# Altium PCB Vertical.PcbDoc
Units mm, origin at the board's own origin, x right, y up, seen from the top; angles counter-clockwise.
Board outline 53.95 x 47.07 mm, 2 copper layers (Top Layer, Bottom Layer), stack 1.58 mm thick; 38 components, 9 nets, 75 pads, 43 vias.
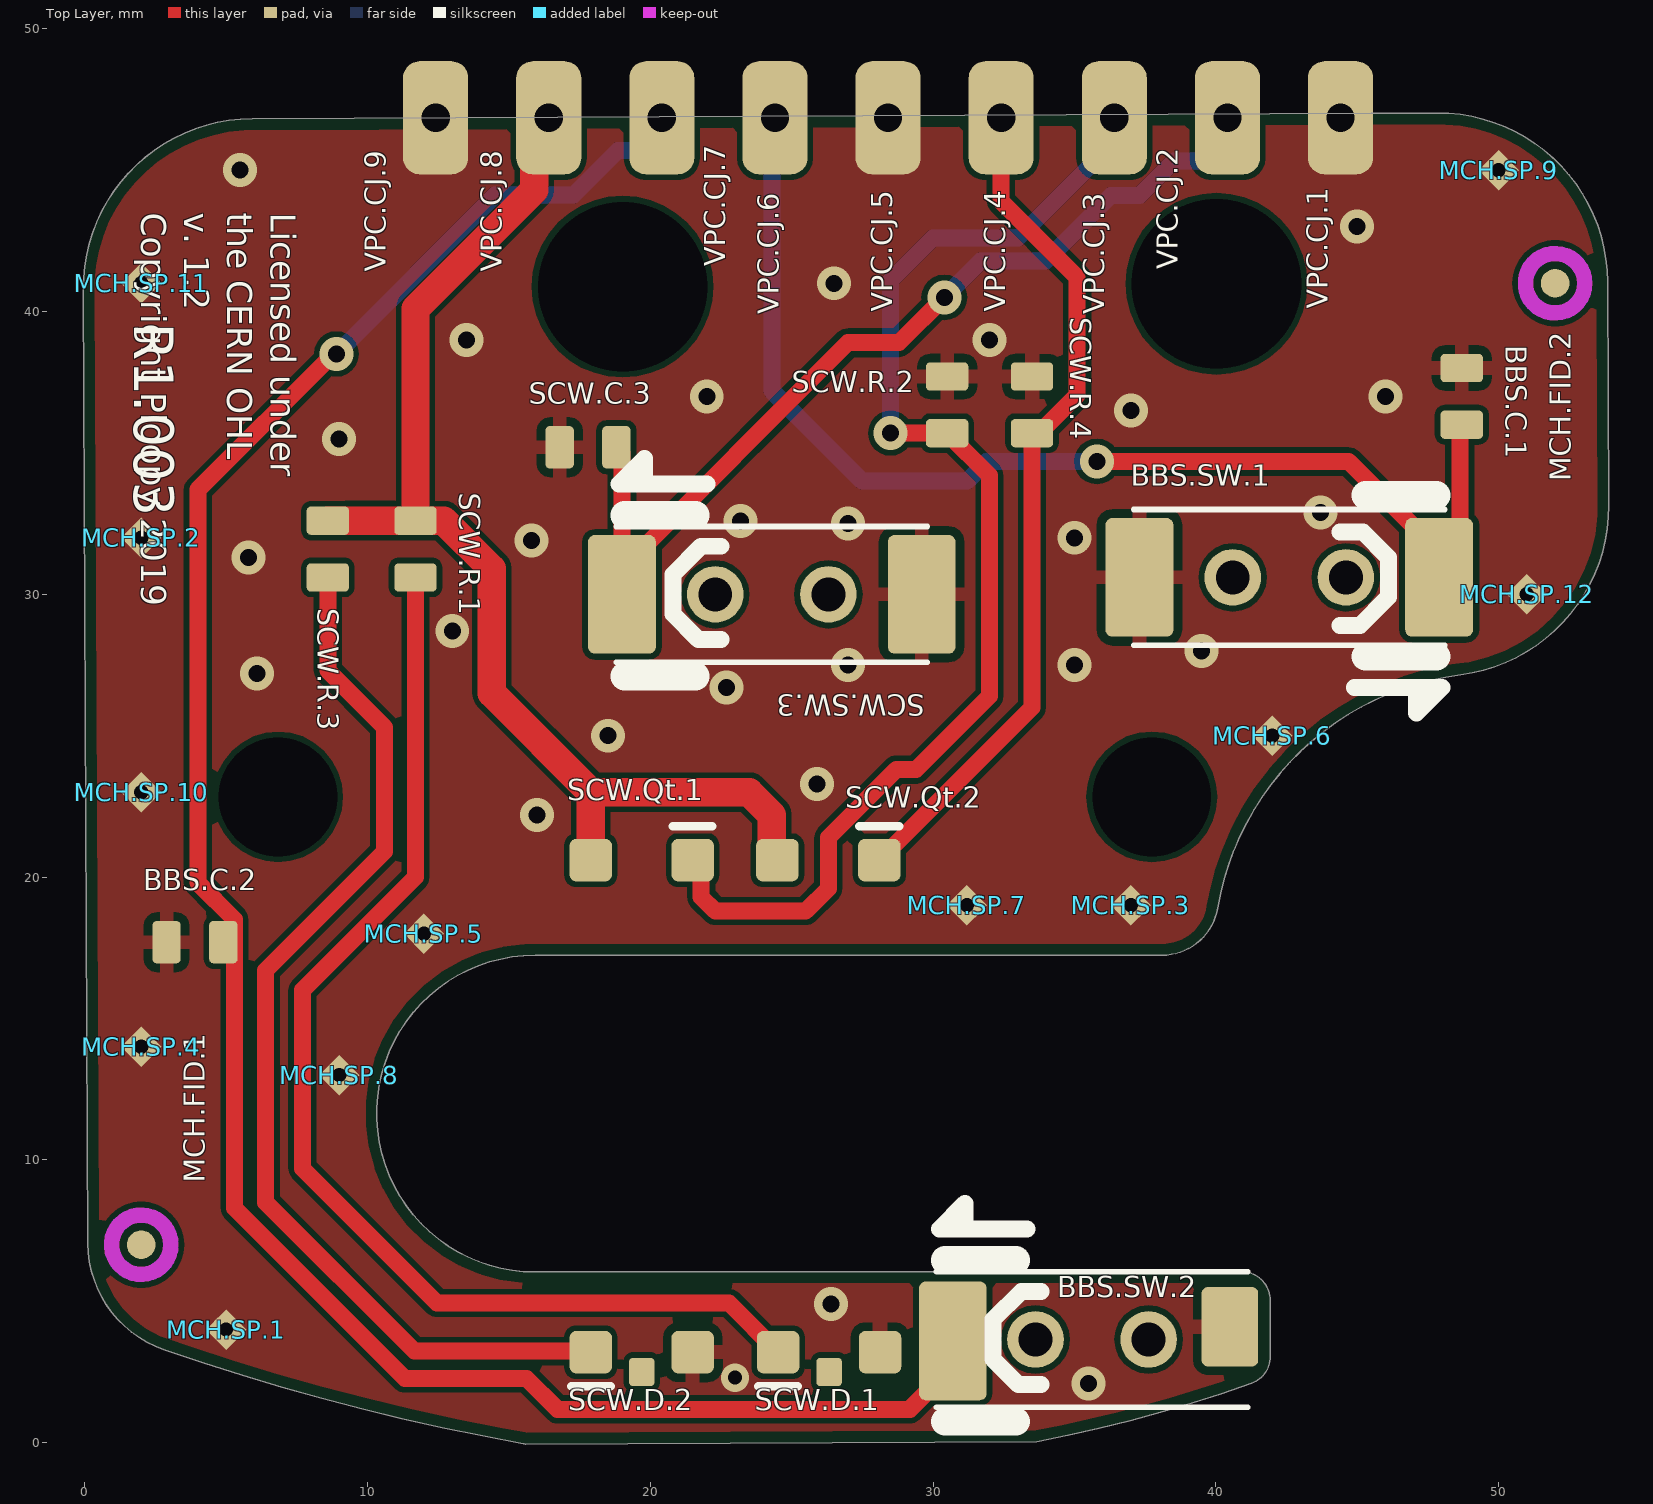
[diagram p0: Top Layer view]
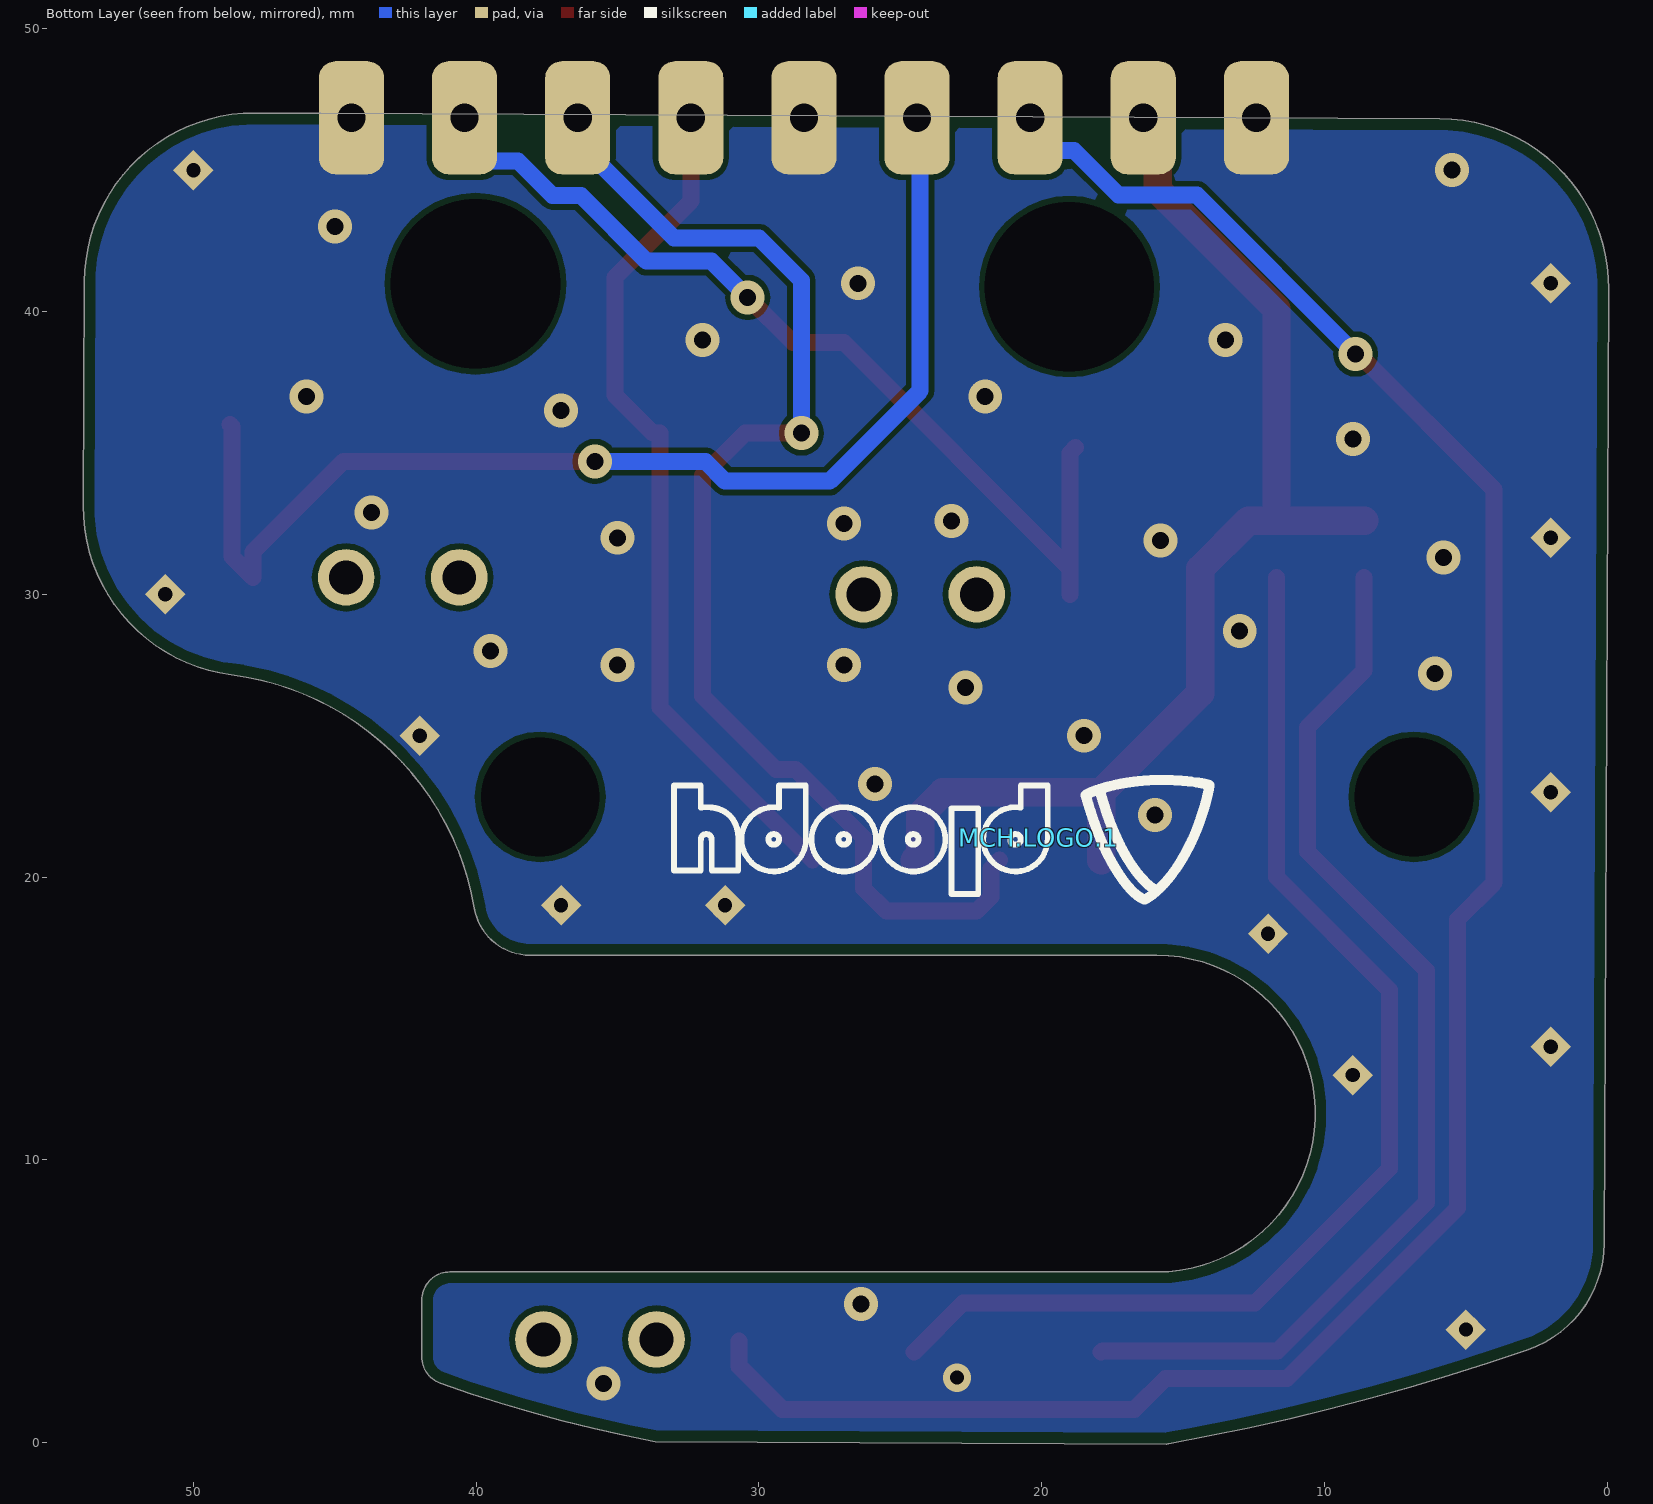
[diagram p1: Bottom Layer view, seen from below]

## Layer stack, top to bottom
Top Mask: solder mask 0.01, Solder Resist, Dk 3.5
Top Layer: signal copper 0.0356
Dielectric 4: core 1.509, Dk 4.2
Bottom Layer: signal copper 0.0356
Bottom Solder: solder mask 0.01, Solder Resist, Dk 3.5

## Board outline
2.805,3.289 ccw(c30.608,83.613) 15.509,-0.035 ccw(c24.39,49.169) 15.591,-0.05 33.666,0.037 ccw(c24.391,49.17) 41.267,2.104 ccw(c40.929,3.045) 41.929,3.045 41.929,5.037 ccw(c40.929,5.037) 40.929,6.037 15.929,6.037 cw(c15.929,11.637) 15.929,17.237 38.097,17.237 ccw(c38.097,19.237) 40.069,18.904 cw(c49.929,17.237) 48.659,27.156 ccw(c47.897,33.108) 53.897,33.137 53.858,41.05 ccw(c47.858,41.021) 47.829,47.021 45.521,47.009 5.921,46.818 ccw(c5.95,40.818) -0.05,40.789 0.113,7.049 ccw(c4.113,7.069)

## Design rules (kind name [scope] priority, off if disabled: settings)
BoardOutlineClearance [(Not HasFootprint('SPARKGAP'))] p1: gap=0.4 ignorepadtopadclearanceinfootprint=FALSE
Clearance "HighV Pads" [(InNetClass('HighV') AND (IsPad OR IsVia)) vs IsPad OR IsVia] p1: gap=0.4 ignorepadtopadclearanceinfootprint=FALSE except(0: Arc-Hole Track-Hole SMDPad-Hole THPad-Hole Via-Hole Fill-Hole Poly-Hole Region-Hole Text-Hole) // Establishes minimum clearance between bare pads that are high voltage, per IPC2221A Table 6-1, 51-100V, condition A6
Clearance Inter-Pad [IsPad vs IsPad] p2: gap=0.2 ignorepadtopadclearanceinfootprint=FALSE except(0: Arc-Hole Track-Hole SMDPad-Hole THPad-Hole Via-Hole Fill-Hole Poly-Hole Region-Hole Text-Hole)
Clearance "Spark Gaps" [InNetClass('Spark Gap') vs InNet('GND') And InPoly] p3: gap=0.635 ignorepadtopadclearanceinfootprint=FALSE except(0: Arc-Hole Track-Hole SMDPad-Hole THPad-Hole Via-Hole Fill-Hole Poly-Hole Region-Hole Text-Hole)
Clearance FIDs [Name like 'FID*'] p4: gap=1.016 ignorepadtopadclearanceinfootprint=FALSE except(0: Arc-Hole Track-Hole SMDPad-Hole THPad-Hole Via-Hole Fill-Hole Poly-Hole Region-Hole Text-Hole)
Clearance "Inner Planes" [InPoly AND OnMid] p5: gap=0.3 ignorepadtopadclearanceinfootprint=FALSE except(0: Arc-Hole Track-Hole SMDPad-Hole THPad-Hole Via-Hole Fill-Hole Poly-Hole Region-Hole Text-Hole) // Defines a larger clearance for planes on inner layers.
Clearance "All Planes" [InPoly] p6: gap=0.2 ignorepadtopadclearanceinfootprint=FALSE except(0: Arc-Hole Track-Hole SMDPad-Hole THPad-Hole Via-Hole Fill-Hole Poly-Hole Region-Hole Text-Hole) // Defines minimum clearance between planes on the same layer.
Clearance "Inner Layer Clearance" [OnMid vs OnMid] p7: gap=0.3 ignorepadtopadclearanceinfootprint=FALSE except(0: Arc-Hole Track-Hole SMDPad-Hole THPad-Hole Via-Hole Fill-Hole Poly-Hole Region-Hole Text-Hole) // We will give inner layers more spacing because they tend to be subject to stricter process limits.
Clearance [All] p8: gap=0.22 ignorepadtopadclearanceinfootprint=FALSE except(0: Arc-Hole Track-Hole SMDPad-Hole THPad-Hole Via-Hole Fill-Hole Poly-Hole Region-Hole Text-Hole) // 2 oz (70um) boards require at least 10mil spacing. We give a bit more to make sure things work well.
ComponentClearance "Terminal Block" [(HasFootprint('Phoenix 1933189 - Header')) vs (HasFootprint('Phoenix 1933189 - Header'))] p1: gap=-2.286 collisioncheckmode=3 verticalgap=0.254 showdistances=FALSE
ComponentClearance "FET/TP self Clearance" [(Name like 'Q*') Or (Name like 'TP*') vs (Name like 'Q*') Or (Name like 'TP*')] p2: gap=0.254 collisioncheckmode=3 verticalgap=0.254 showdistances=FALSE
ComponentClearance [Not ((Name like 'H*') Or (Name like 'FID*') Or (Name like 'SP*')) vs Not ((Name like 'H*') Or (Name like 'FID*') Or (Name like 'SP*'))] p3: gap=0.5 collisioncheckmode=3 verticalgap=0.5 showdistances=FALSE
DiffPairsRouting [All] p1: maxlimit=0.508 minlimit=0.279 mostfreqgap=0.279 toplayer_minwidth=0.279 toplayer_maxwidth=0.508 toplayer_prefwidth=0.381 bottomlayer_minwidth=0.279 bottomlayer_maxwidth=0.508 bottomlayer_prefwidth=0.381 maxuncoupledlength=12.7
Height [All] p1: minheight=0 maxheight=41 prefheight=12.7
HoleSize [All] p1: absolutevalues=TRUE maxlimit=100 minlimit=0.3 maxpercent=80.000 minpercent=20.000
HoleToHoleClearance [All] p1: gap=1.016 allowstackedmicrovias=TRUE
LayerPairs [All] p1: enforce=FALSE
MinimumSolderMaskSliver [All] p1: minsoldermaskwidth=0.09
NetAntennae [Not (HasFootprint('BALANCE_RESISTOR'))] p1: netantennaetolerance=0
PasteMaskExpansion [All] p1: expansion=-0.025
PlaneClearance [All] p1: clearance=0.4
PlaneConnect [All] p1: pad.planeconnectstyle=Relief pad.reliefexpansion=0.5 pad.reliefentries=4 pad.reliefconductorwidth=0.5 pad.reliefairgap=0.3 via.planeconnectstyle=Direct via.reliefexpansion=0.8 via.reliefentries=4 via.reliefconductorwidth=0.8 via.reliefairgap=0.3
PolygonConnect "PolygonConnect SparkGap" [HasFootprint('SparkGap')] p1: connectstyle=Direct reliefconductorwidth=0.254 reliefentries=4 polygonreliefangle="90 Angle" airgapwidth=0.254 // Ensures spark gaps get a direct connection to plane.
PolygonConnect PolygonConnect_GND [All vs InNet('GND')] p2: thpad.connectstyle=Relief thpad.reliefconductorwidth=0.5 thpad.reliefentries=4 thpad.polygonreliefangle="90 Angle" thpad.airgapwidth=0.3 smdpad.connectstyle=Relief smdpad.reliefconductorwidth=0.5 smdpad.reliefentries=4 smdpad.polygonreliefangle="90 Angle" smdpad.airgapwidth=0.3 via.connectstyle=Direct via.reliefconductorwidth=0.8 via.reliefentries=4 via.polygonreliefangle="90 Angle" via.airgapwidth=0.3 // This rule specifies all vias and holes connected to a GND plane have direct connections.
PolygonConnect [All] p3: thpad.connectstyle=Relief thpad.reliefconductorwidth=0.5 thpad.reliefentries=4 thpad.polygonreliefangle="90 Angle" thpad.airgapwidth=0.25 smdpad.connectstyle=Relief smdpad.reliefconductorwidth=0.5 smdpad.reliefentries=4 smdpad.polygonreliefangle="90 Angle" smdpad.airgapwidth=0.25 via.connectstyle=Direct via.reliefconductorwidth=0.508 via.reliefentries=4 via.polygonreliefangle="90 Angle" via.airgapwidth=0.254
RoutingVias [All] p1: holewidth=0.5 width=1 viastyle="Through Hole" minholewidth=0.2 minwidth=0.5 maxholewidth=5.08 maxwidth=6.35
ShortCircuit [Not (InPadClass('TraceResistorPads')) vs Not (InPadClass('TraceResistorPads'))] p1: allowed=FALSE
SilkToBoardRegionClearance [All] p1 off:
SilkToSilkClearance [All] p1 off: silktosilkclearance=0.254
SilkToSolderMaskClearance SilkscreenOverComponentPads [IsPad] p1: minsilkscreentomaskgap=0.102 clearancetoexposedcopper=FALSE
SolderMaskExpansion [All] p1: expansion=0.076
Width [All] p1: maxlimit=50.8 minlimit=0.26 preferedwidth=0.4 minimp=50.000000 maximp=50.000000 favimp=50.000000
15 further rules are at their usual default settings.

## Classes and differential pairs
component class VPC: VPC.CJ.1 VPC.CJ.2 VPC.CJ.3 VPC.CJ.4 VPC.CJ.5 VPC.CJ.6 VPC.CJ.7 VPC.CJ.8 VPC.CJ.9
component class SCW: SCW.C.3 SCW.D.1 SCW.D.2 SCW.Qt.1 SCW.Qt.2 SCW.R.1 SCW.R.2 SCW.R.3 SCW.R.4 SCW.SW.3
component class BBS: BBS.C.1 BBS.C.2 BBS.SW.1 BBS.SW.2
component class MCH: MCH.FID.1 MCH.FID.2 MCH.LOGO.1 MCH.SP.1 MCH.SP.2 MCH.SP.3 MCH.SP.4 MCH.SP.5 MCH.SP.6 MCH.SP.7 MCH.SP.8 MCH.SP.9 MCH.SP.10 MCH.SP.11 MCH.SP.12

## Components (designator, comment, footprint, x,y, rotation, side; value= is the part's Value field where it differs from the comment)
BBS.C.1 "0805" 0805 48.7,37 r0 top value="0.01uF 100V" (schematic designator C1)
BBS.C.2 "0805" 0805 3.9,17.7 r90 top value="0.01uF 100V" (schematic designator C2)
BBS.SW.1 "D2LS-21" D2LS-21#1 42.6,30.6 r180 top (schematic designator SW1)
BBS.SW.2 "D2LS-21" D2LS-21#2 35.625,3.65 r0 top (schematic designator SW2)
MCH.FID.1 "IPC-7351 Fiducial 1mm" FIDUCIAL_1.5 2,7 r90 top (schematic designator FID1)
MCH.FID.2 "IPC-7351 Fiducial 1mm" FIDUCIAL_1.5 52,41 r90 top (schematic designator FID2)
MCH.LOGO.1 "Ploopy logo, silkscreen" PloopyLogo 20.1,21.4 r0 bottom (schematic designator LOGO1)
MCH.SP.1 "Spark Gap" SparkGap 5,4 r90 top (schematic designator SP1)
MCH.SP.2 "Spark Gap" SparkGap 2,32 r90 top (schematic designator SP2)
MCH.SP.3 "Spark Gap" SparkGap 37,19 r90 top (schematic designator SP3)
MCH.SP.4 "Spark Gap" SparkGap 2,14 r90 top (schematic designator SP4)
MCH.SP.5 "Spark Gap" SparkGap 12,18 r90 top (schematic designator SP5)
MCH.SP.6 "Spark Gap" SparkGap 42,25 r90 top (schematic designator SP6)
MCH.SP.7 "Spark Gap" SparkGap 31.2,19 r90 top (schematic designator SP7)
MCH.SP.8 "Spark Gap" SparkGap 9,13 r90 top (schematic designator SP8)
MCH.SP.9 "Spark Gap" SparkGap 50,45 r90 top (schematic designator SP9)
MCH.SP.10 "Spark Gap" SparkGap 2,23 r90 top (schematic designator SP10)
MCH.SP.11 "Spark Gap" SparkGap 2,41 r90 top (schematic designator SP11)
MCH.SP.12 "Spark Gap" SparkGap 51,30 r90 top (schematic designator SP12)
SCW.C.3 "0805" 0805 17.8,35.2 r90 top value="0.01uF 100V" (schematic designator C3)
SCW.D.1 "XZTHI56W-1" XZTHI56W-1 26.325,3.2 r270 top (schematic designator D1)
SCW.D.2 "XZTHI56W-1" XZTHI56W-1 19.7,3.2 r270 top (schematic designator D2)
SCW.Qt.1 "PT26-51B/TR8" PT26-51B/TR8 19.7,20.6 r90 top (schematic designator Qt1)
SCW.Qt.2 "PT26-51B/TR8" PT26-51B/TR8 26.3,20.6 r90 top (schematic designator Qt2)
SCW.R.1 "0805" 0805 11.7,31.6 r180 top value="100R 1%" (schematic designator R1)
SCW.R.2 "0805" 0805 30.5,36.7 r0 top value="1k 1%" (schematic designator R2)
SCW.R.3 "0805" 0805 8.6,31.6 r180 top value="100R 1%" (schematic designator R3)
SCW.R.4 "0805" 0805 33.5,36.7 r0 top value="1k 1%" (schematic designator R4)
SCW.SW.3 "D2LS-21" D2LS-21#1 24.3,30 r0 top (schematic designator SW3)
VPC.CJ.1 "PCBJointCastellationJoint" PCBJoint 44.411,46.851 r0 top (schematic designator CJ1)
VPC.CJ.2 "PCBJointCastellationJoint" PCBJoint 40.411,46.851 r0 top (schematic designator CJ2)
VPC.CJ.3 "PCBJointCastellationJoint" PCBJoint 36.411,46.851 r0 top (schematic designator CJ3)
VPC.CJ.4 "PCBJointCastellationJoint" PCBJoint 32.411,46.851 r0 top (schematic designator CJ4)
VPC.CJ.5 "PCBJointCastellationJoint" PCBJoint 28.411,46.851 r0 top (schematic designator CJ5)
VPC.CJ.6 "PCBJointCastellationJoint" PCBJoint 24.411,46.851 r0 top (schematic designator CJ6)
VPC.CJ.7 "PCBJointCastellationJoint" PCBJoint 20.411,46.851 r0 top (schematic designator CJ7)
VPC.CJ.8 "PCBJointCastellationJoint" PCBJoint 16.411,46.851 r0 top (schematic designator CJ8)
VPC.CJ.9 "PCBJointCastellationJoint" PCBJoint 12.411,46.851 r0 top (schematic designator CJ9)

## Footprints (in the part's own frame and the unit in brackets; to place one, negate y for a bottom-side part, rotate by r counter-clockwise, add the part's x,y. Pads: shape width x height; smd on the part's side, far side on the other; paste and mask are expansions set on the pad)
0805 [mm] "Chip Capacitor, 2-Leads, Body 2.0x1.3mm, IPC Medium Density"
  rrect30% 1.5x1 smd paste-2.515: 1(0,1.002) 2(0,-1.002)
  body extent -0.72,-1.1 0.72,1.1, height 0.8
D2LS-21#1 [mm]
  rrect20% 2.4x4.2 smd paste-0.03: A(-5.3,0) B(5.3,0)
  round 2 hole 1.2: ""(-2,0) ""(2,0)
  silkscreen extent -5.5,-2.9 5.5,4.8, body extent -5.6,-2.4 5.6,2.4, height 3.19
D2LS-21#2 [mm]
  rrect20% 2.4x4.2 smd paste-0.03: A(-4.925,-0.05)
  rrect20% 2x2.8 smd paste-0.03: B(4.875,0.45)
  round 2 hole 1.2: ""(-2,0) ""(2,0)
  silkscreen extent -5.5,-2.9 5.5,4.8, body extent -5.6,-2.4 5.6,2.4, height 3.19
FIDUCIAL_1.5 [mil]
  round 40 smd paste-60 mask+30: 1(0,0)
  Top Layer keep-out circle w21.65: c0,0 r41.34
PCBJoint [mm]
  rrect50% 2.3x4 hole 1 paste-99: 1(0,0)
PloopyLogo [mm]
  silkscreen extent -6.04,-2.03 12.9,2.2
PT26-51B/TR8 [mm]
  rrect30% 1.5x1.5 smd paste-0.06: C(0,1.802) E(0,-1.802)
  silkscreen extent 1.2,-2.5 1.2,-1.1, body extent -2.05,-1.6 0.45,1.6, height 1.6
SparkGap [mil]
  rect 40x40 smd rot 45 paste-99 mask+4: 1(0,0)
  rect 40x40 smd far side rot 45 paste-99 mask+4: 1(0,0)
XZTHI56W-1 [mm]
  rrect30% 1.5x1.5 smd paste-0.06: A(0,-1.802) C(0,1.802)
  rrect30% 1x0.9 smd paste-0.06: ""(0.7,0.002)
  silkscreen extent 1.2,-2.5 1.2,-1.1, body extent -2.29,-1.5 0.2,1.5, height 1

## Part data
BBS.C.1 BBS.C.2 SCW.C.3: library part "Cap 0.01uF 100V", "0805, X5R or better", Supplier Part Number 1=1276-6845-2-ND, PNP-A=0, PNP-da=0, PNP-dx=0, PNP-dy=0, PNP-FeedType=Tape, PNP-Level=1, PNP-Lv=1, PNP-Nzl=2, PNP-PlacePriority=1, PNP-Pt=0, PNP-TapeIndex=1, PNP-TapeWidth=8, PNP-Thk=0.85, PNP-TS=70, PNP-Type=chi, PNP-Voff=0, PNP-W=0, PNP-X=2.00, PNP-Y=1.25, Supplier 1=Digi-Key, Supplier 2=Arrow, Supplier Part Number 2=HFLC7Kmwq4-6R2SVzaQAUvCwxvZH1YjWdj_EBba1ByE
BBS.SW.1 BBS.SW.2 SCW.SW.3: "Compact Surface-mounting Switch for long durability", Supplier Part Number 1=Z4378CT-ND, Supplier 1=Digi-Key, Supplier 2=Mouser, Supplier Part Number 2=653-D2LS-21
MCH.FID.1 MCH.FID.2: library part FIDUCIAL_1.5, PNP-A=1, PNP-da=0, PNP-dx=0, PNP-dy=0, PNP-FeedType=Fiducial, PNP-Level=1, PNP-Lv=1, PNP-Nzl=2, PNP-PlacePriority=0, PNP-Pt=0, PNP-TapeIndex=0, PNP-TapeWidth=0, PNP-Thk=1.02, PNP-TS=70, PNP-Type=MARK1, PNP-Voff=0, PNP-W=0, PNP-X=4, PNP-Y=4
MCH.LOGO.1: library part PloopyLogo, PNP-A=0, PNP-da=0, PNP-dx=0, PNP-dy=0, PNP-FeedType=Tape, PNP-Level=1, PNP-Lv=1, PNP-Nzl=2, PNP-PlacePriority=1, PNP-Pt=0, PNP-TapeIndex=1, PNP-TapeWidth=8, PNP-Thk=1, PNP-TS=70, PNP-Type=CHI, PNP-Voff=0, PNP-W=0, PNP-X=1, PNP-Y=1
MCH.SP.1 MCH.SP.2 MCH.SP.3 MCH.SP.4 MCH.SP.5 MCH.SP.6 MCH.SP.7 MCH.SP.8 MCH.SP.9 MCH.SP.10 MCH.SP.11 MCH.SP.12: "Open square pad for spark gapping", PNP-A=0, PNP-da=0, PNP-dx=0, PNP-dy=0, PNP-FeedType=Tape, PNP-Level=1, PNP-Lv=1, PNP-Nzl=2, PNP-PlacePriority=1, PNP-Pt=0, PNP-TapeIndex=1, PNP-TapeWidth=8, PNP-Thk=1, PNP-TS=70, PNP-Type=CHI, PNP-Voff=0, PNP-W=0, PNP-X=1, PNP-Y=1
SCW.D.1 SCW.D.2: "Infrared (IR) Emitter 880nm 1.3V 50mA 1mW/sr @ 20mA 30° 2-SMD, No Lead", Supplier Part Number 1=1497-1205-1-ND, PNP-A=0, PNP-da=0, PNP-dx=0, PNP-dy=0, PNP-FeedType=Tape, PNP-Level=1, PNP-Lv=26, PNP-Nzl=2, PNP-PlacePriority=1, PNP-Pt=0, PNP-TapeIndex=1, PNP-TapeWidth=8, PNP-Thk=0.9, PNP-TS=70, PNP-Type=CAP, PNP-Voff=0, PNP-W=0, PNP-X=2.00, PNP-Y=1.25, Supplier 1=Digi-Key
SCW.Qt.1 SCW.Qt.2: "Phototransistor 940nm Side View 1206 (3216 Metric)", Supplier Part Number 1=1080-1387-1-ND, PNP-A=0, PNP-da=0, PNP-dx=0, PNP-dy=0, PNP-FeedType=Tape, PNP-Level=1, PNP-Lv=26, PNP-Nzl=2, PNP-PlacePriority=1, PNP-Pt=0, PNP-TapeIndex=1, PNP-TapeWidth=8, PNP-Thk=0.9, PNP-TS=70, PNP-Type=CAP, PNP-Voff=0, PNP-W=0, PNP-X=2.00, PNP-Y=1.25, Supplier 1=Digi-Key, Supplier 2=Arrow, Supplier 3=Mouser, Supplier Part Number 2=PT26-51B/TR8, Supplier Part Number 3=638-PT2651BTR8
SCW.R.1 SCW.R.3: library part "Res 100R 1% 0805", "Chip resistor", Supplier Part Number 1=RMCF0805FT100RCT-ND, PNP-A=0, PNP-da=0, PNP-dx=0, PNP-dy=0, PNP-FeedType=Tape, PNP-Level=1, PNP-Lv=1, PNP-Nzl=2, PNP-PlacePriority=1, PNP-Pt=0, PNP-TapeIndex=1, PNP-TapeWidth=8, PNP-Thk=0.55, PNP-TS=70, PNP-Type=chi, PNP-Voff=0, PNP-W=0, PNP-X=2.00, PNP-Y=1.25, Supplier 1=Digi-Key, Supplier 2=Digi-Key, Supplier Part Number 2=RMCF0805FT100RTR-ND
SCW.R.2 SCW.R.4: library part "Res 1k 1% 0805", "Chip resistor, 1/8W 100PPM", Supplier Part Number 1=RMCF0805FT1K00TR-ND, PNP-A=0, PNP-da=0, PNP-dx=0, PNP-dy=0, PNP-FeedType=Tape, PNP-Level=1, PNP-Lv=1, PNP-Nzl=2, PNP-PlacePriority=1, PNP-Pt=0, PNP-TapeIndex=1, PNP-TapeWidth=8, PNP-Thk=0.55, PNP-TS=70, PNP-Type=chi, PNP-Voff=0, PNP-W=0, PNP-X=2.00, PNP-Y=1.25, Supplier 1=Digi-Key
VPC.CJ.1 VPC.CJ.2 VPC.CJ.3 VPC.CJ.4 VPC.CJ.5 VPC.CJ.6 VPC.CJ.7 VPC.CJ.8 VPC.CJ.9: library part PCBJoint, "Pad for soldering a castellated PCB edge. Easy way to join two PCBs together.", PNP-A=0, PNP-da=0, PNP-dx=0, PNP-dy=0, PNP-FeedType=Tape, PNP-Level=1, PNP-Lv=1, PNP-Nzl=2, PNP-PlacePriority=1, PNP-Pt=0, PNP-TapeIndex=1, PNP-TapeWidth=8, PNP-Thk=1, PNP-TS=70, PNP-Type=CHI, PNP-Voff=0, PNP-W=0, PNP-X=1, PNP-Y=1

## Free pads (board coordinates)
  round 0 hole 4.2: ""(6.838,22.837) ""(37.738,22.837)
  round 0 hole 6: ""(19.023,40.881) ""(40.023,40.983)

## Via types
v1: diameter 1.2, hole 0.6, Top Layer to Bottom Layer, 30 vias
v2: diameter 1.016, hole 0.508, Top Layer to Bottom Layer, 12 vias
v3: diameter 1, hole 0.5, Top Layer to Bottom Layer, 1 vias

## Nets (pads, with @x,y where several pads share a name; then routed paths per layer and width w, separated by ;. In a path a pad name is that pad's centre, name@x,y a point inside that pad or via, vN(x,y) a via of type N, cw(c..) or ccw(c..) an arc to the next point about the centre after c; other vN are vias at no path point)
3V3: SCW.Qt.1.C SCW.Qt.2.C SCW.R.1.2 SCW.R.3.2 VPC.CJ.8.1 | length 41.8
  Top Layer w1: SCW.R.3.2 SCW.R.1.2 ; VPC.CJ.8.1@16.411,45.556 16.099,45.556 15.9,45.357 15.9,44.3 11.7,40.1 SCW.R.1.2 ; SCW.Qt.1.C 17.898,23.002 ; SCW.Qt.2.C 24.3,20.798 24.3,22.2 23.498,23.002 17.898,23.002 ; SCW.R.1.2 12.698,32.602 14.4,30.9 14.4,26.5 17.898,23.002
GND: BBS.C.1.1 BBS.C.2.1 BBS.SW.1.B BBS.SW.2.B MCH.SP.1.1 MCH.SP.2.1 MCH.SP.3.1 MCH.SP.4.1 MCH.SP.5.1 MCH.SP.6.1 MCH.SP.7.1 MCH.SP.8.1 MCH.SP.9.1 MCH.SP.10.1 MCH.SP.11.1 MCH.SP.12.1 SCW.C.3.1 SCW.D.1.C SCW.D.2.C SCW.R.2.1 SCW.R.4.1 SCW.SW.3.B VPC.CJ.1.1 VPC.CJ.5.1 VPC.CJ.9.1
  other v1: 35.5,2.1 26.4,4.9 16,22.2 25.9,23.3 18.5,25 22.7,26.7 6.1,27.2 27,27.5 35,27.5 39.5,28 13,28.7 5.8,31.3 15.8,31.9 35,32 27,32.5 23.2,32.6 43.7,32.9 9,35.5 37,36.5 22,37 46,37 13.5,39 32,39 26.5,41 45,43 5.5,45
  other v2: 5,4 9,13 2,14 12,18 31.2,19 37,19 2,23 42,25 51,30 2,32 2,41 50,45
  other v3: 23,2.3
NetBBS.C.1_2: BBS.C.1.2 BBS.SW.1.A VPC.CJ.6.1 | length 41.8
  Top Layer w0.6: v1(35.8,34.7) 44.7,34.7 47.9,31.5 BBS.SW.1.A 48.63,31.33 48.63,35.928 BBS.C.1.2
  Bottom Layer w0.6: VPC.CJ.6.1@24.411,45.794 24.3,45.683 24.3,37.2 27.5,34 31.197,34 31.897,34.7 v1(35.8,34.7)
NetBBS.C.2_2: BBS.C.2.2 BBS.SW.2.A VPC.CJ.7.1 | length 77.2
  Top Layer w0.6: v1(8.9,38.5) 8.8,38.5 4,33.7 4,19.8 5.3,18.5 5.3,8.3 11.327,2.273 15.627,2.273 16.72,1.18 29.18,1.18 30.7,2.7 BBS.SW.2.A
  Bottom Layer w0.6: v1(8.9,38.5) 14.518,44.118 17.282,44.118 18.864,45.7 20.337,45.7 VPC.CJ.7.1@20.411,45.775
NetSCW.C.3_2: SCW.C.3.2 SCW.SW.3.A VPC.CJ.2.1 | length 32.9
  Top Layer w0.6: SCW.C.3.2 19,35.002 SCW.SW.3.A@19,30.9 ; SCW.SW.3.A SCW.SW.3.A@19,30.9 ; v1(30.4,40.5) 28.8,38.9 27,38.9 SCW.SW.3.A@19,30.9
  Bottom Layer w0.6: v1(30.4,40.5) 31.68,41.78 33.98,41.78 36.3,44.1 37.3,44.1 38.521,45.321 39.861,45.321 VPC.CJ.2.1@40.411,45.871
NetSCW.D.1_A: SCW.D.1.A SCW.R.1.1 | length 42.1
  Top Layer w0.6: SCW.R.1.1 11.7,20 7.7,16 7.7,9.7 12.463,4.937 22.785,4.937 SCW.D.1.A
NetSCW.D.2_A: SCW.D.2.A SCW.R.3.1 | length 38.4
  Top Layer w0.6: SCW.R.3.1 8.6,27.3 10.6,25.3 10.6,20.9 6.4,16.7 6.4,8.5 11.662,3.238 17.859,3.238 SCW.D.2.A
NetSCW.Qt.1_E: SCW.Qt.1.E SCW.R.2.2 VPC.CJ.3.1 | length 43.2
  Top Layer w0.6: SCW.Qt.1.E 21.8,20.302 21.8,19.3 22.3,18.8 25.5,18.8 26.3,19.6 26.3,21.4 28.7,23.8 29.4,23.8 32,26.4 32,34.198 SCW.R.2.2 28.602,35.698 28.6,35.7 v1(28.5,35.7)
  Bottom Layer w0.6: v1(28.5,35.7) 28.5,41.1 30,42.6 33.01,42.6 36.262,45.852 VPC.CJ.3.1@36.411,45.852
NetSCW.Qt.2_E: SCW.Qt.2.E SCW.R.4.2 VPC.CJ.4.1 | length 29.4
  Top Layer w0.6: SCW.Qt.2.E 33.5,25.998 SCW.R.4.2 33.75,35.698 35.1,37.048 35.1,41.2 32.4,43.9 32.4,45.821 VPC.CJ.4.1@32.411,45.833
pads on no net: BBS.SW.1. BBS.SW.2. MCH.FID.1.1 MCH.FID.2.1 SCW.D.1. SCW.D.2. SCW.SW.3.

## Polygon pours and split planes (outlines as drawn)
GND on Bottom Layer "Bottom Layer-GND" (solid, pour order 0): -1,-1 55,-1 55,49 -1,49
GND on Top Layer "Top Layer-GND" (solid, pour order 2): -1,-1 55,-1 55,49 -1,49

## Silkscreen, mask and mechanical layers (free items; w line width, h text height)
Top Overlay:
  text "Licensed under  / the CERN OHL  / v. 1.2  / Copyright Ploopy 2019" at 1.7,43.5 h1.52 r270
  text "R1.003" at 1.3,39.6 h2.4 r270
Mechanical 1:
  circle w0.1: c37.629,3.637 r1.2
Board Outline:
  the board outline again, w0.1